# Altium PCB TPA backup.PcbDoc
Units mm, origin at the board's own origin, x right, y up, seen from the top; angles counter-clockwise.
Board outline 71.12 x 45.72 mm, 2 copper layers (TopLayer, BottomLayer); 14 components, 0 nets, 52 pads, 0 vias.
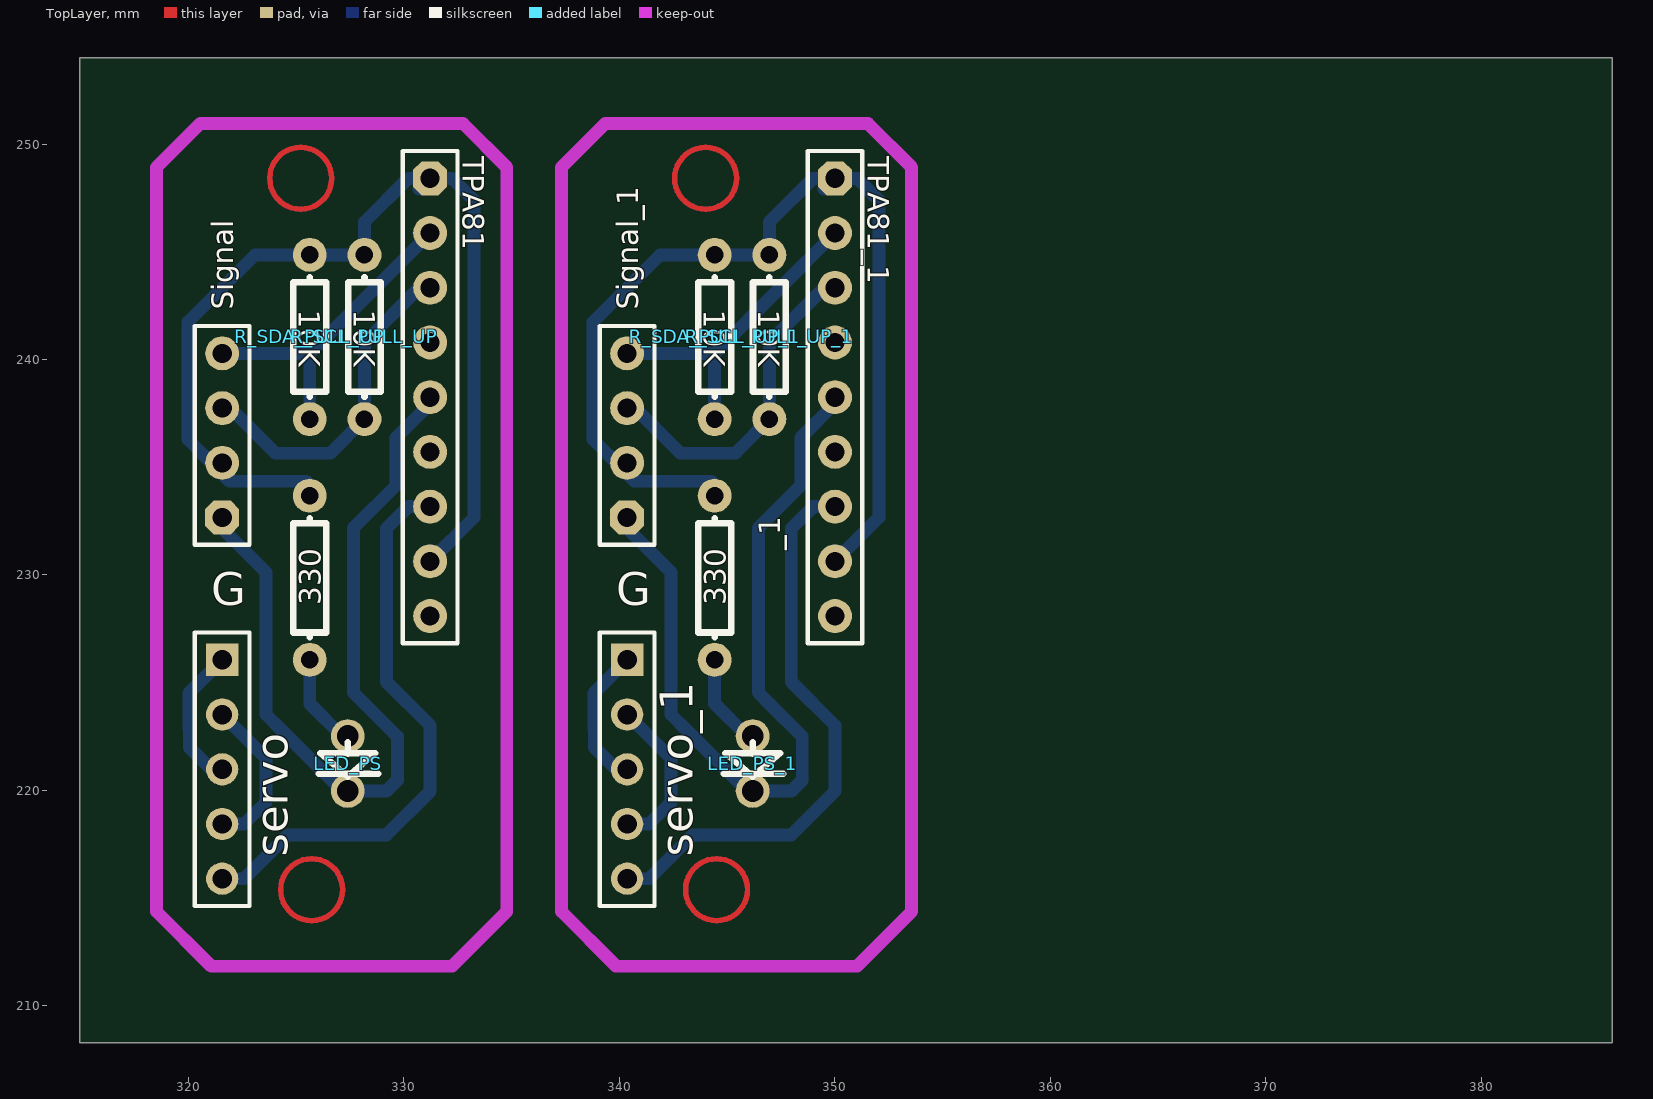
[diagram p0: TopLayer view]
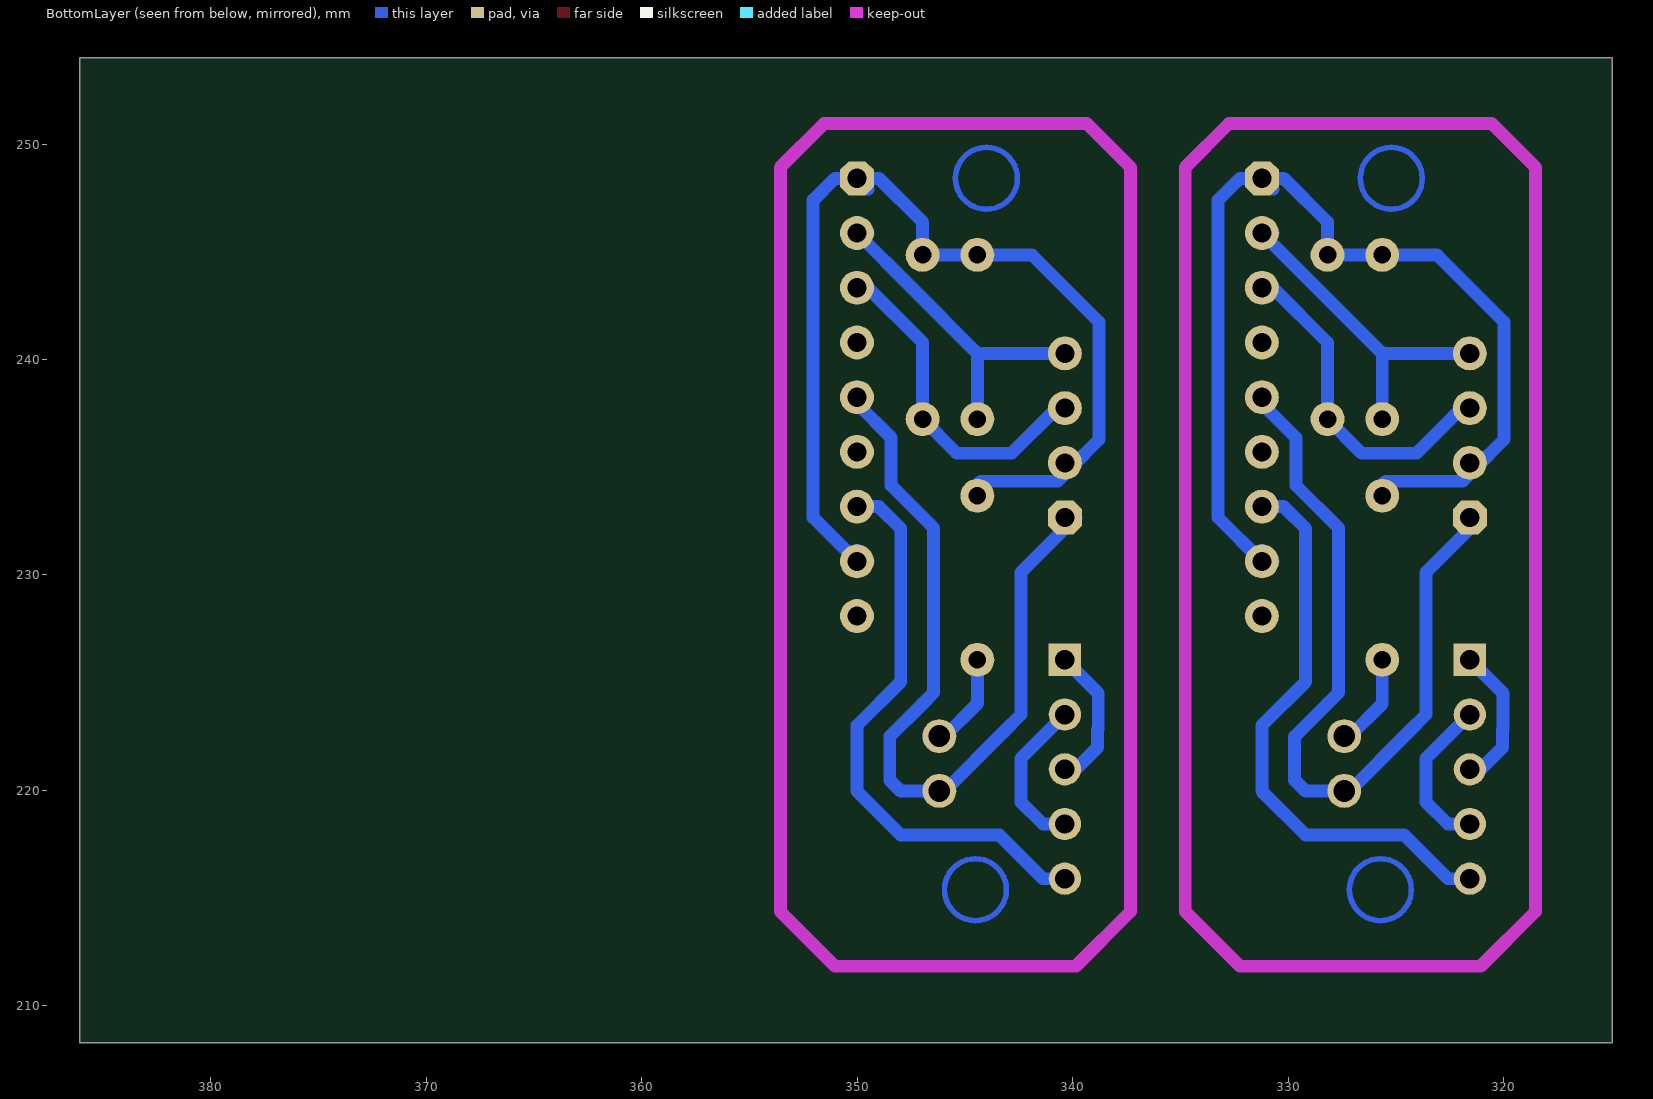
[diagram p1: BottomLayer view, seen from below]

## Layer stack, top to bottom
TopLayer: signal copper 0.0356
Dielectric: dielectric 0.32, FR-4, Dk 4.8
BottomLayer: signal copper 0.0356

## Board outline
314.96,254 386.08,254 386.08,208.28 314.96,208.28 314.96,254

## Design rules (kind name [scope] priority, off if disabled: settings)
Clearance [All] p1: gap=0.5
FabricationTestPointUsage TestPointUsage [All] p1: valid=0 allowmultiple=FALSE
FabricationTestpoint Testpoint [All] p1: side=3 testpointundercomponent=TRUE minsize=1.016 maxsize=2.54 preferedsize=1.524 minholesize=0.508 maxholesize=1.016 preferedholesize=0.813 testpointgrid=0.025 allowsidetop=TRUE allowsidebottom=TRUE usegrid=TRUE gridtolerance=0
PolygonConnect [All] p1: connectstyle=Relief reliefconductorwidth=0.254 reliefentries=4 polygonreliefangle="90 Angle"
RoutingLayers [All] p1: top layer_v5=FALSE bottom layer_v5=TRUE
RoutingVias [All] p1: holewidth=0.711 width=1.27 viastyle="Through Hole" minholewidth=0.711 minwidth=1.27 maxholewidth=0.711 maxwidth=1.27
SilkscreenOverComponentPads [All] p1: minsilkscreentomaskgap=0.254
SolderMaskExpansion [All] p1: expansion=0.102
Width [All] p1: maxlimit=1 minlimit=0.5 preferedwidth=0.6
24 further rules are at their usual default settings.

## Components (designator, comment, footprint, x,y, rotation, side; value= is the part's Value field where it differs from the comment)
_1 "330" AXIAL0.3 344.424,226.06 r90 top
LED_PS "LED" DIODAKU 327.152,221.488 r0 top
LED_PS_1 "LED" DIODAKU 345.948,221.488 r0 top
R_SCL_PULL_UP "10K" AXIAL0.3 328.168,237.236 r90 top
R_SCL_PULL_UP_1 "10K" AXIAL0.3 346.964,237.236 r90 top
R_SDA_PULL_UP "10K" AXIAL0.3 325.628,237.236 r90 top
R_SDA_PULL_UP_1 "10K" AXIAL0.3 344.424,237.236 r90 top
servo "Comment" HDR1X5 321.564,226.06 r270 top
servo_1 "Comment" HDR1X5 340.36,226.06 r270 top
Signal "" HDR1X4 321.564,232.664 r90 top
Signal_1 "" HDR1X4 340.36,232.664 r90 top
TPA81 "HEADER 9" HDR1X9 331.216,248.412 r270 top
TPA81_1 "HEADER 9" HDR1X9 350.012,248.412 r270 top
? "330" AXIAL0.3 325.628,226.06 r90 top

## Footprints (in the part's own frame and the unit in brackets; to place one, negate y for a bottom-side part, rotate by r counter-clockwise, add the part's x,y. Pads: shape width x height; smd on the part's side, far side on the other; paste and mask are expansions set on the pad)
AXIAL0.3 [mil]
  round 62 hole 32: 1(0,0) 2(300,0)
  silkscreen extent 41,-30 259,30
DIODAKU [mil]
  round 62 hole 40: A(9.5,40.5) K(9.5,-59.5)
  silkscreen extent -44,-34 66,30
HDR1X4 [mil]
  oct 62x62 hole 35: gnd_tpa(0,0)
  round 62 hole 35: scl(300,0) sda(200,0) vcc_tpa(100,0)
  silkscreen extent -50,-50 350,50
HDR1X5 [mm] "Connector; Header; 5 Position"
  rect 1.5x1.5 hole 0.9: 1(0,0)
  round 1.5 hole 0.9: 2(2.54,0) 3(5.08,0) 4(7.62,0) 5(10.16,0)
  silkscreen extent -1.27,-1.27 11.43,1.27
HDR1X9 [mil]
  round 62 hole 35: 4(300,0) 6(500,0) data_servo(600,0) gnd_servo(800,0) gnd_tpa(400,0) scl(200,0) sda(100,0) vcc_servo(700,0)
  oct 62x62 hole 35: vcc_tpa(0,0)
  silkscreen extent -50,-50 850,50

## Nets (pads, with @x,y where several pads share a name; then routed paths per layer and width w, separated by ;. In a path a pad name is that pad's centre, name@x,y a point inside that pad or via, vN(x,y) a via of type N, cw(c..) or ccw(c..) an arc to the next point about the centre after c; other vN are vias at no path point)
pads on no net: ?.1 ?.2 _1.1 _1.2 LED_PS.A LED_PS.K LED_PS_1.A LED_PS_1.K R_SCL_PULL_UP.1 R_SCL_PULL_UP.2 R_SCL_PULL_UP_1.1 R_SCL_PULL_UP_1.2 R_SDA_PULL_UP.1 R_SDA_PULL_UP.2 R_SDA_PULL_UP_1.1 R_SDA_PULL_UP_1.2 servo.1 servo.2 servo.3 servo.4 servo.5 servo_1.1 servo_1.2 servo_1.3 servo_1.4 servo_1.5 Signal.gnd_tpa Signal.scl Signal.sda Signal.vcc_tpa Signal_1.gnd_tpa Signal_1.scl Signal_1.sda Signal_1.vcc_tpa TPA81.4 TPA81.6 TPA81.data_servo TPA81.gnd_servo TPA81.gnd_tpa TPA81.scl TPA81.sda TPA81.vcc_servo TPA81.vcc_tpa TPA81_1.4 TPA81_1.6 TPA81_1.data_servo TPA81_1.gnd_servo TPA81_1.gnd_tpa TPA81_1.scl TPA81_1.sda TPA81_1.vcc_servo TPA81_1.vcc_tpa
copper on no net: | length 328.5
  BottomLayer w0.6: 321.056,232.664 323.596,230.124 323.596,223.52 324.374,222.742 327.139,219.977 328.917,219.977 328.93,219.964 329.184,219.964 329.692,220.472 329.692,222.504 328.168,224.028 327.66,224.536 327.66,232.188 329.629,234.156 329.629,236.37 331.216,237.957 331.216,238.252 ; 321.056,235.204 321.909,234.351 325.465,234.351 325.628,234.188 ; 321.287,234.973 319.977,236.283 319.977,237.023 319.977,241.745 323.088,244.856 325.628,244.856 328.168,244.856 328.168,246.38 330.2,248.412 331.216,248.412 ; 321.564,215.9 322.58,215.9 323.596,216.916 324.612,217.932 329.184,217.932 331.216,219.964 331.216,223.012 329.184,225.044 329.184,232.156 330.2,233.172 331.216,233.172 ; 321.564,218.44 322.58,218.44 323.596,219.456 323.596,221.488 321.564,223.52 ; 321.564,220.98 321.056,220.98 320.04,221.996 320.04,222.826 320.014,222.852 320.014,224.51 321.564,226.06 ; 321.564,237.744 321.945,237.744 324.041,235.649 325.544,235.649 326.581,235.649 326.644,235.712 328.168,237.236 328.168,240.792 330.708,243.332 331.216,243.332 ; 321.564,240.284 324.104,240.284 325.628,240.284 ; 325.628,226.06 325.628,224.028 327.152,222.504 ; 325.628,237.236 325.628,240.284 ; 325.73,240.386 325.628,240.284 ; 330.708,230.632 331.216,230.632 ; 330.708,245.872 331.216,245.872 328.676,243.332 325.628,240.284 ; 331.216,231.14 331.216,230.632 ; 339.852,232.664 342.392,230.124 342.392,223.52 343.17,222.742 345.935,219.977 347.713,219.977 347.726,219.964 347.98,219.964 348.488,220.472 348.488,222.504 346.964,224.028 346.456,224.536 346.456,232.188 348.425,234.156 348.425,236.37 350.012,237.957 350.012,238.252 ; 339.852,235.204 340.705,234.351 344.261,234.351 344.424,234.188 ; 340.083,234.973 338.773,236.283 338.773,237.023 338.773,241.745 341.884,244.856 344.424,244.856 346.964,244.856 346.964,246.38 348.996,248.412 350.012,248.412 ; 340.36,215.9 341.376,215.9 342.392,216.916 343.408,217.932 347.98,217.932 350.012,219.964 350.012,223.012 347.98,225.044 347.98,232.156 348.996,233.172 350.012,233.172 ; 340.36,218.44 341.376,218.44 342.392,219.456 342.392,221.488 340.36,223.52 ; 340.36,220.98 339.852,220.98 338.836,221.996 338.836,222.826 338.81,222.852 338.81,224.51 340.36,226.06 ; 340.36,237.744 340.741,237.744 342.837,235.649 344.34,235.649 345.377,235.649 345.44,235.712 346.964,237.236 346.964,240.792 349.504,243.332 350.012,243.332 ; 340.36,240.284 342.9,240.284 344.424,240.284 ; 344.424,226.06 344.424,224.028 345.948,222.504 ; 344.424,237.236 344.424,240.284 ; 344.526,240.386 344.424,240.284 ; 349.504,230.632 350.012,230.632 ; 349.504,245.872 350.012,245.872 347.472,243.332 344.424,240.284 ; 350.012,231.14 350.012,230.632 ; 331.216,230.632 333.248,232.664 333.248,247.396 332.232,248.412 331.216,248.412 ; 331.216,248.412 330.708,247.904 331.216,248.412 ; 350.012,230.632 352.044,232.664 352.044,247.396 351.028,248.412 350.012,248.412 ; 350.012,248.412 349.504,247.904 350.012,248.412

## Keep-outs
KeepOutLayer:
  lines w0.6: 318.516,214.376 318.516,248.92 320.548,250.952 332.74,250.952 334.772,248.92 334.772,214.376 332.232,211.836 321.056,211.836 318.516,214.376 ; 337.312,214.376 339.852,211.836 351.028,211.836 353.568,214.376 353.568,248.92 351.536,250.952 339.344,250.952 337.312,248.92 337.312,214.376

## Other copper
MultiLayer:
  circle w0.254: c344.511,215.392 r1.437
  circle w0.254: c344.003,248.412 r1.437
  circle w0.254: c325.207,248.412 r1.437
  circle w0.254: c325.715,215.392 r1.437

## Silkscreen, mask and mechanical layers (free items; w line width, h text height)
TopOverlay:
  text "G" at 321.056,228.6 h1.52
  text "G" at 339.852,228.6 h1.52